# Altium PCB CustomTP4056Module.PcbDoc
Units mil, origin at the board's own origin, x right, y up, seen from the top; angles counter-clockwise.
Board outline 1325 x 550 mil, 2 copper layers (Top Layer, Bottom Layer); 13 components, 10 nets, 33 pads, 3 vias.
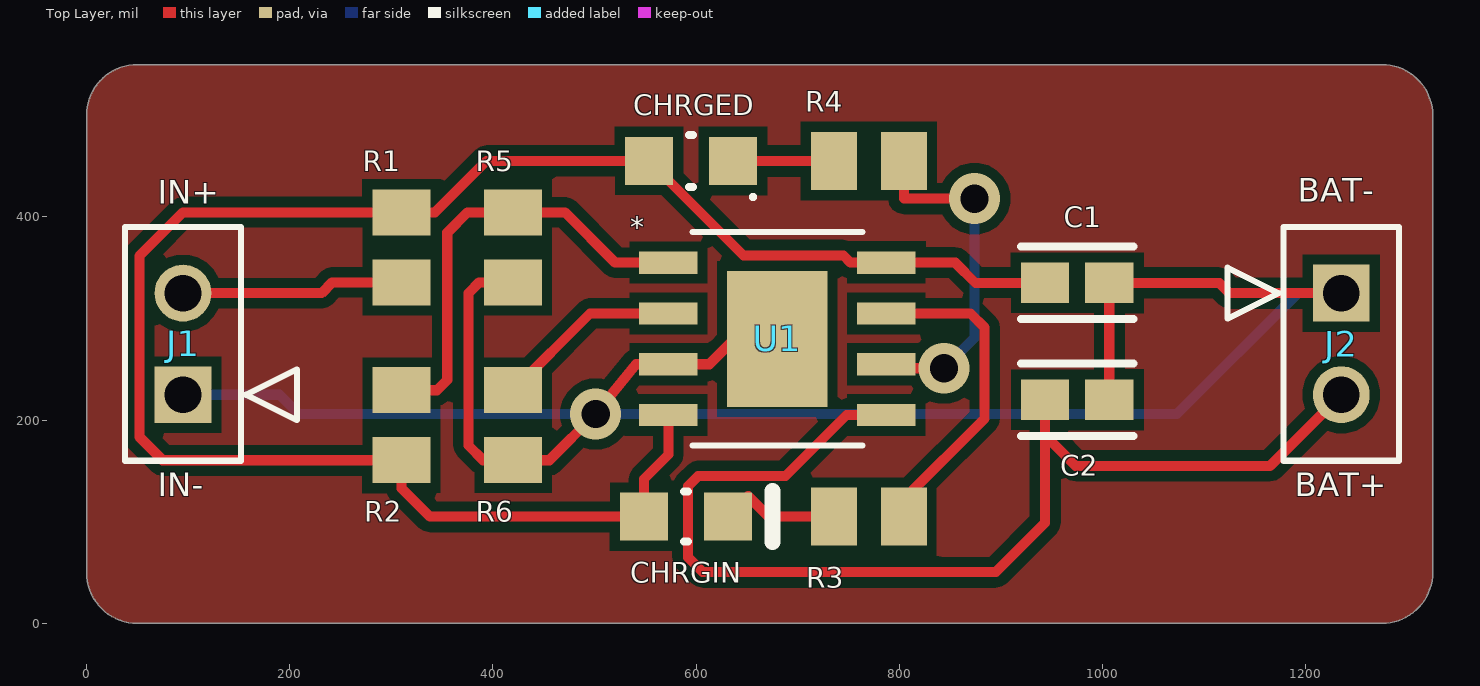
[diagram p0: Top Layer view]
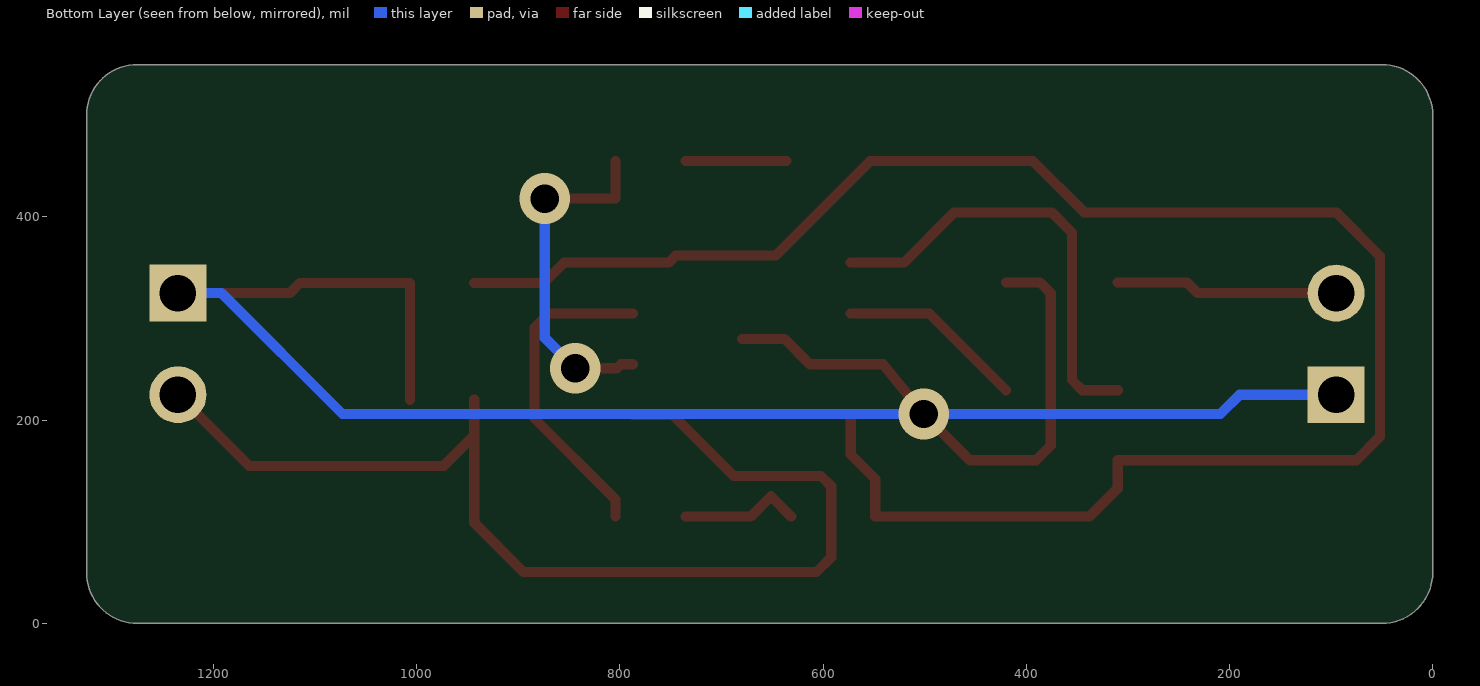
[diagram p1: Bottom Layer view, seen from below]

## Layer stack, top to bottom
Top Solder: solder mask 0.4, Solder Resist, Dk 3.5
Top Layer: signal copper 1.4
Dielectric 1: dielectric 12.6, FR-4, Dk 4.8
Bottom Layer: signal copper 1.4
Bottom Solder: solder mask 0.4, Solder Resist, Dk 3.5

## Board outline
0,50 0,85.36 0,500 cw(c50,500) 50,550 1275,550 cw(c1275,500) 1325,500 1325,50 cw(c1275,50) 1275,0 85.36,0 50,0 cw(c50,50)

## Design rules (kind name [scope] priority, off if disabled: settings)
Clearance [All] p1: gap=10 ignorepadtopadclearanceinfootprint=FALSE
PolygonConnect [All] p1: connectstyle=Relief reliefconductorwidth=10 reliefentries=4 polygonreliefangle="90 Angle" airgapwidth=10
RoutingVias [All] p1: holewidth=28 width=50 viastyle="Through Hole" minholewidth=28 minwidth=50 maxholewidth=28 maxwidth=50
SolderMaskExpansion [All] p1: expansion=4 istentingtop=FALSE
Width [All] p1: maxlimit=10 minlimit=10 preferedwidth=10
30 further rules are at their usual default settings.

## Classes and differential pairs
component class CustomTP4056Module: C1 C2 CHRGIN J1 J2 R1 R2 R3 R4 R5 R6 U1

## Components (designator, comment, footprint, x,y, rotation, side; value= is the part's Value field where it differs from the comment)
C1 "GRM188R60J106ME47D" FP-GRM188-0_1-e0_2_0_55-IPC_A 975,335 r0 top
C2 "GRM188R60J106ME47D" FP-GRM188-0_1-e0_2_0_55-IPC_A 975,220 r0 top
CHRGED "LTST-C170KGKT" LTST-LTST-C170KGKT-2_V 595,455 r180 top (schematic designator DS2)
CHRGIN "LTST-C170KRKT" LTST-C170KRKT_V 590,105 r0 top (schematic designator DS1)
J1 "Connector" CONN_M20-99902_HRW 95,225 r270 top
J2 "Connector" CONN_M20-99902_HRW 1235,325 r90 top
R1 "ERJ6ENF2200V" RESC2013X70X40NL20T20 310,370 r270 top
R2 "ERJ6ENF2200V" RESC2013X70X40NL20T20 310,195 r270 top
R3 "ERJ6ENF2200V" RESC2013X70X40NL20T20 770,105 r180 top
R4 "ERJ6ENF2200V" RESC2013X70X40NL20T20 770,455 r180 top
R5 "ERJ6ENF2200V" RESC2013X70X40NL20T20 420,370 r90 top
R6 "ERJ6ENF2200V" RESC2013X70X40NL20T20 420,195 r270 top
U1 "TP4056" ESOP8_TPW 680,280 r0 top

## Footprints (in the part's own frame and the unit in brackets; to place one, negate y for a bottom-side part, rotate by r counter-clockwise, add the part's x,y. Pads: shape width x height; smd on the part's side, far side on the other; paste and mask are expansions set on the pad)
CONN_M20-99902_HRW [mil]
  rect 56x56 / inner round 60 / far side rect 56x56 hole 36 paste-99999 mask+0: 1(0,0)
  round 56 / inner round 60 / far side round 56 hole 36 paste-99999 mask+0: 2(-100,0)
  silkscreen extent -165,-57 65,112, body extent -150,-492 50,13, height 100
ESOP8_TPW [mil]
  rect 57.5x22 smd paste+0 mask+0: 1(-107.25,75) 2(-107.25,25) 3(-107.25,-25) 4(-107.25,-75) 5(107.25,-75) 6(107.25,-25) 7(107.25,25) 8(107.25,75)
  rect 99x134 smd paste-66.5 mask+0: 9(0,0)
  silkscreen extent -84,-105 84,105, body extent -122,-100 122,100, height 69
FP-GRM188-0_1-e0_2_0_55-IPC_A [mil]
  rect 47.57x39.85 smd paste+0 mask+0: 1(-31.57,0) 2(31.57,0)
  silkscreen extent -55,-36 55,36, body extent -75,-40 75,40, height 10
LTST-C170KRKT_V [mm] "SMD, 2-Leads, Body 2x1.25mm"
  rect 1.2x1.2 smd: 1(-1.05,0) 2(1.05,0)
  silkscreen extent -0.05,-0.64 2.16,0.64, body extent -1,-0.63 1,0.63, height 1.2
LTST-LTST-C170KGKT-2_V [mm] "SMD, 2-Leads, Body 2.00x1.25mm"
  rect 1.2x1.2 smd: 1(-1.05,0) 2(1.05,0)
  silkscreen extent -1.6,-0.65 0.05,0.95, body extent -1,-0.63 1,0.63, height 1.1
RESC2013X70X40NL20T20 [mm] "Chip Resistor, 2-Leads, Body 2.00x1.25mm, IPC Medium Density"
  rect 1.15x1.45 smd: 1(-0.875,0) 2(0.875,0)
  body extent -1.1,-0.72 1.1,0.72, height 0.7

## Part data
C1 C2: library part CMP-2006-02792-2, "Chip Multilayer Ceramic Capacitors for General Purpose, 0603, 10uF, X5R, 15%, 20%, 6.3V", Capacitance=10uF, Case Code (Imperial)=0603, Case Code (Metric)=1608, Dielectric=X5R, Max Operating Temperature=85°C, Min Operating Temperature=-55°C, Package Quantity=4000, Tolerance=20%, Voltage=6.3V, Case/Package=0603, Depth=0.8mm, Height=0.8mm, Lead Free="Lead Free", Length=1.6mm, Material=Ceramic, Mount="Surface Mount", Packaging="Tape and Reel", Radiation Hardening=No, REACH SVHC="No SVHC", Termination=SMD/SMT, Thickness=0.035inch, Voltage Rating=6.3V, Voltage Rating (DC)=6.3V, Width=0.031inch
CHRGED: library part CMP-2000-06620-1, "Ultra Bright AlInGaP Chip LED, 75 mW, -55 to 85 degC, 2-Pin SMD (0805), RoHS, Tape and Reel", Emitting Color=YellowGreen, Forward Current=30mA, Forward Voltage=2.4V, Manufacturer=Lite-On, Operating Temp Range=-55Cto85C, Operating Temperature Classification=Industrial, Package Description="2-Pin Surface Mounted Device, Body 2 x 1.25 mm", Package Reference=LTST-C170KGKT-2, Package Type=ChipLed, Power Dissipation=75W, Power Dissipation Max=75mW, Reverse Voltage=5V, Test Current (It)=20mA, Chip Material=AlGaInP, Datasheet URL=http://optoelectronics.liteon.com/upload/download/DS22-2000-073/S_110_LTST-C170KGKT.pdf, Datasheet Version="Rev. G, 06/2005", DELETED=Compliant, Dominant Wave Length=571nm, Forward Current Max=30mA, High Brightness=Yes, Lens Dimensions=1.4x1.25x0.6mm, Lum Intensity=35mcd, Luminous Intensity=35mcd, Main Category=ChipLED, Manufacturer URL=http://www.us.liteon.com/, Mounting=SurfaceMount, Mounting Technology=SurfaceMount, Number of  Elements=1, Packaging=TapeandReel, Peak Wavelength=574nm, Pin Count=2, Product Depth (mm)=1.25mm, Product Height (mm)=1.1mm, Product Length (mm)=2mm, Rad Hardened=No, Shape Type=Rectangular, Type=Uni-Color, Viewing Angle=130deg
CHRGIN: library part CMP-2000-07593-1, "LED Red, 75 mW, 54 mcd, -55 to 85 degC, 2-Pin SMD, RoHS, Tape and Reel", Case Code (Imperial)=0805, Case Code (Metric)=2012, Colour=Red, Forward Current=30mA, Forward Voltage=2V, Lens Colour=Colorless, Manufacturer=Lite-On, Max Operating Temperature=85degC, Min Operating Temperature=-55degC, Package Description="2-Pin Surface Mount Device, Body 2 x 1.25 mm", Package Quantity=1, Package Reference=C170KRKT, Power Dissipation=75mW, Test Current=20mA, Case\/Package=0805, Datasheet URL=http://optoelectronics.liteon.com/upload/download/DS-22-99-0150/LTST-C170KRKT.pdf, Datasheet Version="Rev. D, 11/2014", Depth=1.6mm, Dominant Wavelength=631nm, Height=1.1mm, Illumination Colour=Red, Lead Free=LeadFree, Length=3.2mm, Lens Style=Rectangular, Lens Transparency=Clear, Luminous Intensity=54mcd, Manufacturer URL=http://www.us.liteon.com/, Mount=SurfaceMount, Mounting Technology=SurfaceMount, Number of Elements=1, Number of LEDs=1, Number of Pins=2, Packaging=TapeandReel, Power Rating=75mW, Radiation Hardening=No, RoHSCompliant=True, Viewing Angle=130degrees, Wavelength=639nm, Width=1.25mm
J1 J2: library part M20-9990245, "No Description Available", Mfr_Name=Harwin, RefDes=RefDes, Type=Type
R1 R2 R3 R4 R5 R6: library part CMP-2001-00044-1, Manufacturer=Panasonic, Part Number=ERJ6ENF2200V
U1: "No Description Available", Mfr_Name=TOPPOWER, RefDes=RefDes, Type=Type

## Via types
v1: diameter 50, hole 28, Top Layer to Bottom Layer, 3 vias

## Nets (pads, with @x,y where several pads share a name; then routed paths per layer and width w, separated by ;. In a path a pad name is that pad's centre, name@x,y a point inside that pad or via, vN(x,y) a via of type N, cw(c..) or ccw(c..) an arc to the next point about the centre after c; other vN are vias at no path point)
BAT+: C2.1 J2.2 U1.5 | length 1125.9
  Top Layer w10: U1.5 748,205 688,145 602,145 592,135 592,65 606.57,50.43 895,50.43 943.43,98.86 943.43,185 ; C2.1 943.43,185 ; J2.2 1165,155 973.43,155 943.43,185
GND: C1.2 C2.2 J1.1 J2.1 R5.1 R6.2 U1.3 U1.9 | length 2105.5
  Top Layer w10: R5.1 386.55,335.55 376,325 376,175 390.45,160.55 R6.2 455.55,160.55 v1(501,206) 541,255 U1.3 613,255 638,280 U1.9 ; C2.2 C1.2 1115,335 1125,325 J2.1
  Bottom Layer w10: J1.1 190,225 209,206 v1(501,206) 1073,206 1192,325 J2.1
IN+: J1.2 R1.2 | length 219.4
  Top Layer w10: J1.2 231.39,325 241.94,335.55 R1.2
NetC1_1: C1.1 CHRGED.2 CHRGIN.1 R1.1 R2.2 U1.4 U1.8 | length 1813.1
  Top Layer w10: U1.4 572.75,166.09 548.66,142 CHRGIN.1 338,105 310,133 R2.2 75,160.55 52,183.55 52,361.45 95,404.45 R1.1 343,404.45 393.55,455 CHRGED.2 646.66,362 745,362 752,355 U1.8 855,355 875,335 C1.1
NetDS1_2: CHRGIN.2 R3.2 | length 120.8
  Top Layer w10: CHRGIN.2 651.34,125 671.33,105 R3.2
NetDS2_1: CHRGED.1 R4.2 | length 99.2
  Top Layer w10: CHRGED.1 R4.2
NetR2_1: R2.1 R5.2 U1.1 | length 440.7
  Top Layer w10: R2.1 345,229.45 355,239.45 355,384.45 375,404.45 R5.2 471,404.45 520.45,355 U1.1
NetR3_1: R3.1 U1.7 | length 321.5
  Top Layer w10: U1.7 870,305 884,291 884,201.55 804.45,122 R3.1
NetR4_1: R4.1 U1.6 | length 344.4
  Top Layer w10: U1.6 799,255 803,251 v1(844,251) ; R4.1 804.45,418 v1(874,418)
  Bottom Layer w10: v1(844,251) 874,281 v1(874,418)
NetR6_1: R6.1 U1.2 | length 184
  Top Layer w10: R6.1 495.55,305 U1.2

## Polygon pours and split planes (outlines as drawn)
no net on Top Layer "GND_Pour" (solid, pour order 0): 0,500 cw(c50,500) 50,550 1275,550 cw(c1275,500) 1325,500 1325,50 cw(c1275,50) 1275,0 50,0 cw(c50,50) 0,50

## Silkscreen, mask and mechanical layers (free items; w line width, h text height)
Top Overlay:
  text "BAT-" at 1192,407 h40
  text "IN+" at 70,405 h40
  text "IN-" at 70,117 h40
  text "BAT+" at 1189,117 h40
Mechanical 1:
  lines w10: 0,50 ccw(c50,50) 50,0 85.36,0 1235,0 1275,0 ccw(c1275,50) 1325,50 1325,75 1325,475 1325,500 ccw(c1275,500) 1275,550 1250,550 60,550 50,550 ccw(c50,500) 0,500 0,490 0,85.36 0,50

## Text inside footprints (layer, text, board x,y; h text height)
U1: Top 3D Body "*" at 604,327 h50; Top Overlay "*" at 535,380 h20